# Altium PCB 400236.PcbDoc (part 4 of 7)
Units mm, origin at the board's own origin, x right, y up, seen from the top; angles counter-clockwise.
Board outline 136.53 x 63.5 mm, 4 copper layers (Top Layer, Mid-Layer 1, Mid-Layer 2, Bottom Layer), stack 1.49 mm thick; 344 components, 236 nets, 1364 pads, 1393 vias.
Unrouted connection lines stored in the file: 6.
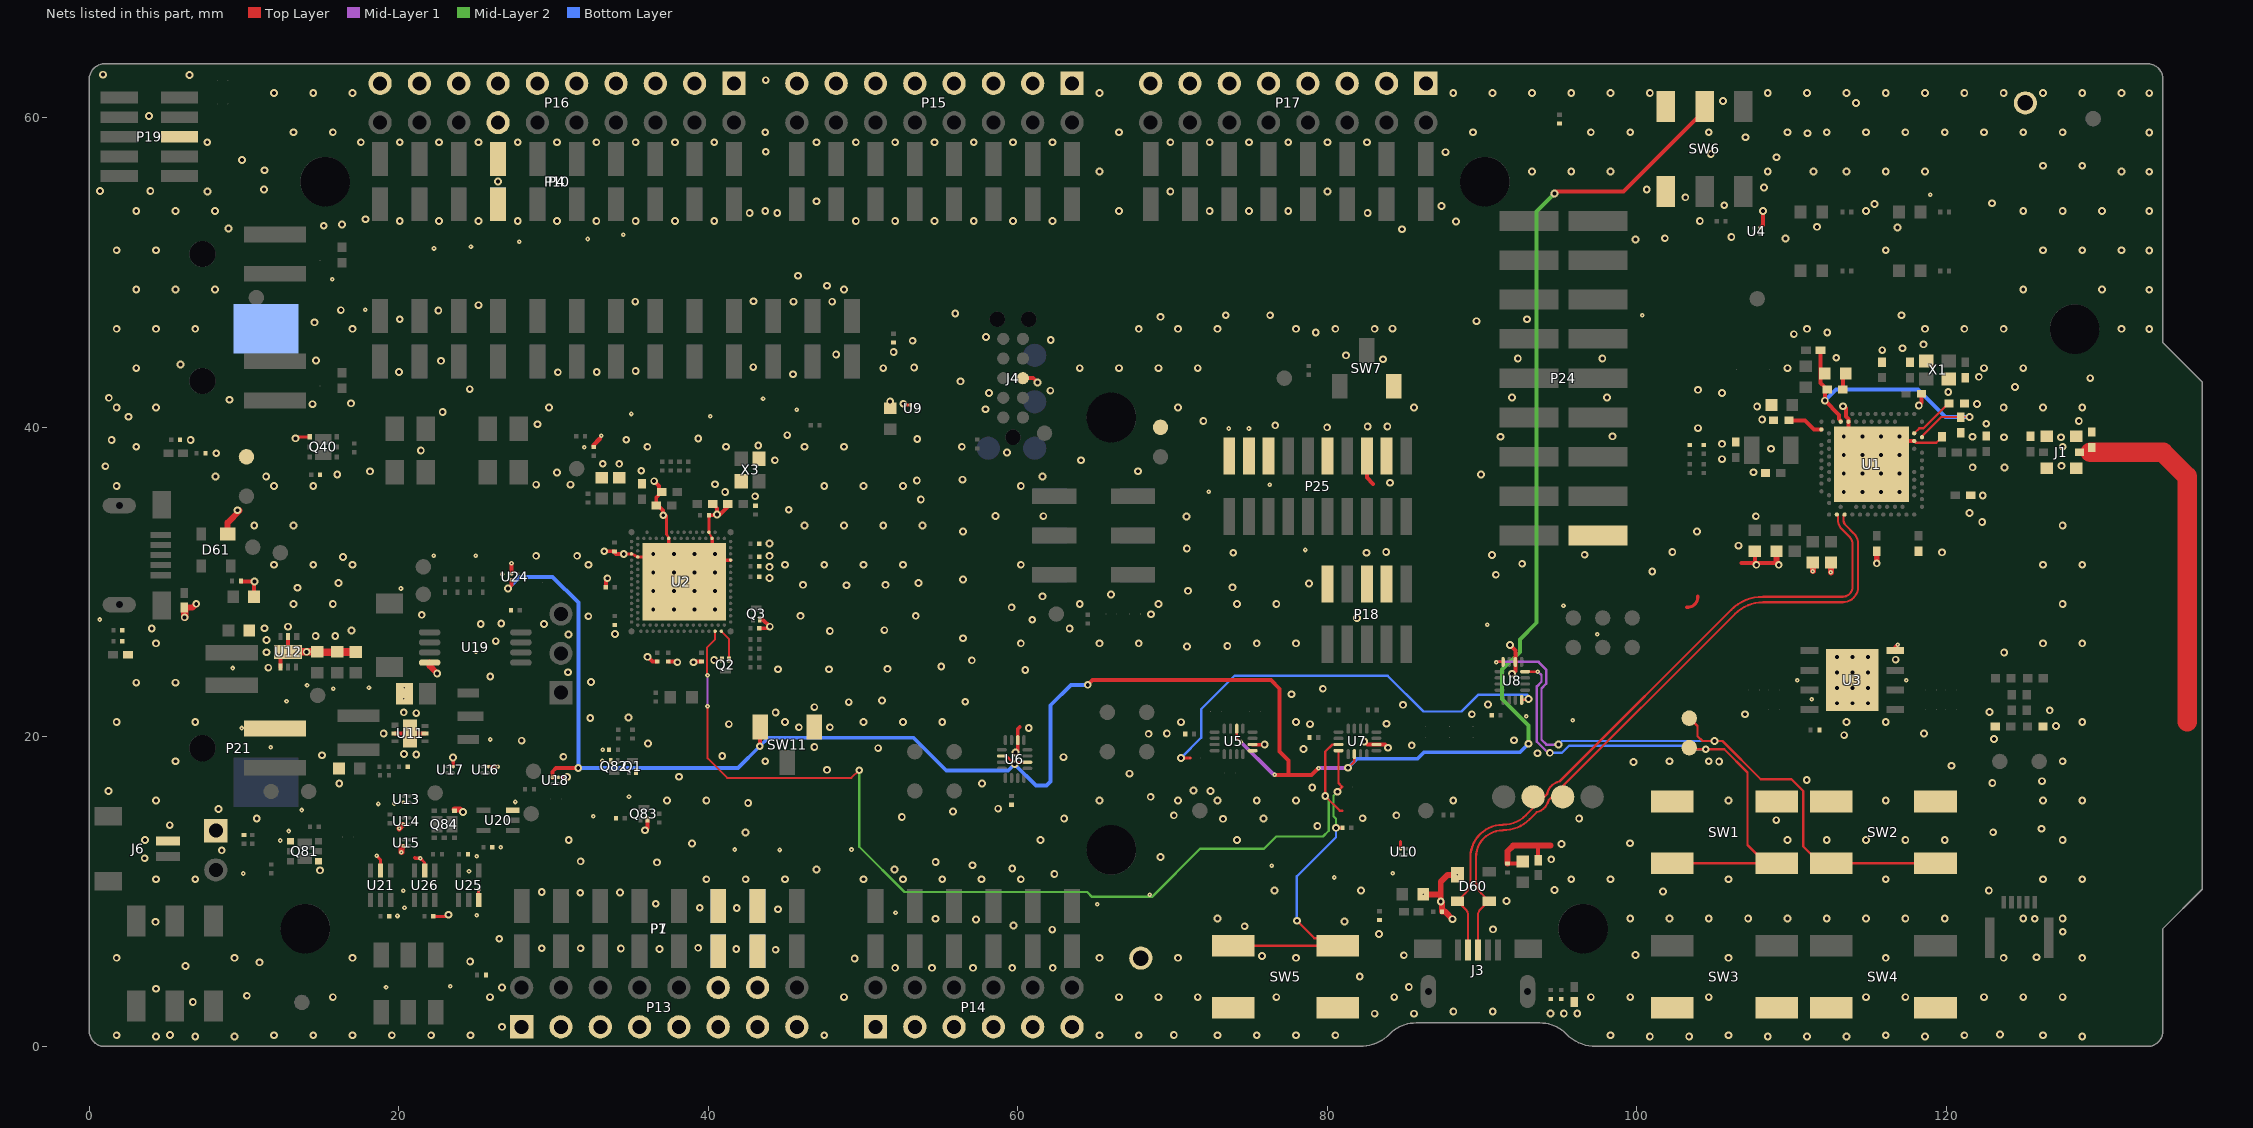
[diagram p4: the nets of this part, all layers, seen from the top]

## Via types
v1: diameter 0.5, hole 0.25, Top Layer to Bottom Layer, tented both sides, 1166 vias
v2: diameter 0.3, hole 0.1, Top Layer to Mid-Layer 1, tented top, 227 vias

## Nets (pads, with @x,y where several pads share a name; then routed paths per layer and width w, separated by ;. In a path a pad name is that pad's centre, name@x,y a point inside that pad or via, vN(x,y) a via of type N, cw(c..) or ccw(c..) an arc to the next point about the centre after c; other vN are vias at no path point) (continued)
GND: (continued)
  other v1: 4.312,0.647 6.852,0.647 9.392,0.647 100.832,0.647 103.372,0.647 108.452,0.647 110.992,0.647 113.532,0.647 118.612,0.647 128.772,0.647 1.772,0.723 11.932,0.723 14.472,0.723 17.012,0.723 19.552,0.723 22.092,0.723 24.632,0.723 47.492,0.723 65.272,0.723 67.812,0.723 72.892,0.723 75.432,0.723 77.972,0.723 80.512,0.723 98.292,0.723 105.912,0.723 116.072,0.723 121.152,0.723 126.232,0.723 5.223,0.737 70.079,0.737 123.463,0.774 26.67,1.27 83.052,2.12 85.592,2.12 94.412,2.134 95.275,2.134 96.139,2.134 88.138,2.261 90.678,2.261 6.696,2.87 15.742,3.187 25.902,3.187 48.762,3.187 66.542,3.187 69.082,3.187 71.622,3.187 76.702,3.187 84.322,3.187 97.022,3.187 99.562,3.187 104.642,3.187 114.802,3.187 117.342,3.187 122.422,3.187 124.962,3.187 127.502,3.187 10.185,3.277 4.309,3.734 26.67,3.81 85.261,3.847 82.093,4.521 52.07,5.08 54.458,5.08 57.099,5.08 59.639,5.08 62.255,5.08 6.214,5.207 10.998,5.436 24.613,5.486 49.454,5.69 1.772,5.727 9.392,5.727 17.012,5.727 65.272,5.727 70.352,5.727 77.972,5.727 105.912,5.727 116.072,5.727 123.692,5.727 128.772,5.727 125.806,5.766 75.768,5.842 84.938,5.893 99.898,5.918 44.348,6.248 36.85,6.3 41.808,6.299 34.35,6.325 29.235,6.35 31.75,6.35 39.345,6.375 26.492,6.96 83.337,7.264 127.508,7.417 62.225,7.55 90.703,7.569 74.651,7.772 59.725,7.825 4.283,8.052 81.102,8.077 57.3,8.2 54.675,8.25 72.892,8.267 99.562,8.267 102.102,8.267 104.642,8.267 107.182,8.267 109.722,8.267 112.262,8.267 114.802,8.267 117.342,8.267 119.882,8.267 124.962,8.267 125.705,8.255 127.502,8.267 44.501,8.865 41.834,8.941 39.446,8.966 36.6,9.225 91.567,9.398 31.725,9.931 34.3,9.95 29.235,9.982 101.676,10.008 76.581,10.084 82.169,10.084 122.733,10.084 94.666,10.109 4.312,10.807 6.852,10.807 39.872,10.807 42.412,10.807 44.952,10.807 50.032,10.807 52.572,10.807 55.112,10.807 57.652,10.807 60.192,10.807 95.752,10.807 98.292,10.807 105.912,10.807 116.072,10.807 126.232,10.807 128.772,10.807 62.357,11.151 14.91,11.379 46.99,11.43 52.032,11.43 59.639,11.506 57.074,11.709 36.678,11.897 54.686,11.913 31.75,11.963 94.463,12.09 3.581,12.167 69.215,12.243 8.56,12.675 95.123,13.081 38.938,13.117 99.543,13.132 3.607,13.335 30.982,13.347 61.462,13.347 74.162,13.347 109.722,13.347 112.262,13.347 114.802,13.347 117.342,13.347 119.882,13.347 127.502,13.347 42.4,13.825 123.012,13.843 126.136,14.072 79.35,14.249 5.207,14.3 109,14.625 73.254,14.707 10.82,14.732 62.992,14.732 75.87,14.732 82.275,14.75 96.266,14.732 52.502,14.834 70.079,14.935 84.455,14.935 24.145,15.149 55.804,15.189 8.357,15.342 58.725,15.367 42.575,15.725 4.312,15.887 37.332,15.887 39.872,15.887 65.272,15.887 70.352,15.887 72.892,15.887 75.432,15.887 77.972,15.887 88.132,15.887 105.912,15.887 116.072,15.887 126.232,15.887 128.772,15.887 68.58,16.129 1.245,16.51 72.441,16.51 71.349,16.535 79.019,16.739 16.154,16.993 57.683,16.993 122.961,17.018 126.162,17.145 110.973,17.221 38.1,17.425 67.208,17.628 47.675,17.875 120.32,18.136 99.775,18.375 5.582,18.427 43.682,18.427 102.102,18.427 104.642,18.427 105.308,18.415 127.502,18.427 23.499,18.673 62.941,18.694 30.632,18.72 40.9,18.775 15.037,18.821 21.133,18.872 20.345,18.898 93.575,18.95 78.461,19.228 50.975,19.275 46.85,19.35 85.446,19.456 36.1,19.575 27.94,19.761 92.05,19.787 123.063,19.863 113.386,20.117 68.45,20.2 19.025,20.218 69.625,20.225 118.542,20.218 60.706,20.574 45.85,20.625 47.85,20.625 127.076,20.701 41.325,20.825 78.867,20.828 83.82,20.853 1.772,20.967 6.852,20.967 44.952,20.967 50.032,20.967 52.572,20.967 55.112,20.967 70.536,20.955 77.972,20.967 113.532,20.967 116.072,20.967 128.772,20.967 32.375,21.225 34.85,21.25 89.332,21.463 106.985,21.463 21.133,21.539 44.35,21.575 20.32,21.59 122.784,21.615 126.67,21.717 46.85,21.925 84.887,22.073 90.373,22.098 112.919,22.173 113.919,22.173 114.919,22.173 49.075,22.25 56.6,22.275 51.225,22.35 77.673,22.758 79.705,23.114 112.919,23.173 113.919,23.173 114.919,23.173 3.042,23.507 5.582,23.507 32.425,23.55 25.908,23.901 91.923,24.079 112.919,24.173 113.919,24.173 114.919,24.173 30.937,24.181 60.475,24.325 44.5,24.375 47.8,24.375 51.575,24.4 11.575,24.475 55.05,24.55 57.025,24.95 40.375,24.975 116.713,24.994 112.919,25.173 113.919,25.173 114.919,25.173 11.45,25.475 123.723,25.451 70.925,25.85 73.533,25.883 4.312,26.047 60.192,26.047 65.272,26.047 67.812,26.047 75.432,26.047 77.972,26.047 126.232,26.047 128.772,26.047 26.264,26.187 11.453,26.262 56.45,26.375 14.628,26.516 15.898,26.516 30.963,26.619 33.975,26.65 47.85,26.85 16.95,26.875 51.375,26.9 4.039,27 11.326,27.024 63.348,27 12.85,27.125 25.298,27.305 29.388,27.305 26.619,27.331 60.925,27.575 81.915,27.686 32.25,27.8 45.95,27.825 53.4,27.825 21.488,27.889 68.6,27.925 36.439,28.227 37.772,28.227 39.105,28.227 40.439,28.227 59.6,28.375 13.202,28.587 15.742,28.587 64.002,28.587 69.082,28.587 74.162,28.587 76.702,28.587 127.502,28.587 61.595,29.083 66.015,29.21 36.439,29.427 37.772,29.427 39.105,29.427 40.439,29.427 70.993,29.439 13.452,29.642 73.863,29.667 48.925,29.8 46.125,29.825 51.45,29.825 78.816,29.921 16.104,29.947 53.575,29.95 56.45,30.175 43.95,30.275 90.881,30.48 36.439,30.627 37.772,30.627 39.105,30.627 40.439,30.627 100.99,30.683 43.955,30.992 11.932,31.127 14.472,31.127 17.012,31.127 32.252,31.127 44.952,31.127 47.492,31.127 50.032,31.127 52.572,31.127 60.192,31.127 107.714,31.117 126.232,31.127 128.772,31.127 92.583,31.191 16.4,31.625 28.875,31.7 31.525,31.7 43.95,31.7 90.627,31.75 96.622,31.775 36.439,31.827 37.772,31.827 39.105,31.827 40.439,31.827 73.914,31.902 82.525,31.902 119.71,31.928 83.795,31.953 102.286,31.953 70.917,32.182 106.553,32.36 43.95,32.5 56.45,33.275 103.886,33.274 10.662,33.667 13.202,33.667 46.222,33.667 48.762,33.667 51.302,33.667 53.842,33.667 127.502,33.667 122.301,33.884 70.891,34.239 107.68,34.258 58.55,34.275 61.646,34.265 37.089,34.327 121.488,34.468 9.575,34.65 45.2,34.675 53.731,35.335 43.025,35.55 122.339,35.592 41.089,35.827 113.364,35.817 114.564,35.817 115.764,35.817 116.964,35.817 1.772,36.207 11.932,36.207 14.472,36.207 47.492,36.207 50.032,36.207 52.572,36.207 60.192,36.207 28.875,36.3 31.1,36.3 40.425,36.325 84.049,36.424 53.475,36.575 56.425,36.625 8.153,36.83 11.43,36.83 61.595,36.83 89.925,36.95 16.027,36.957 113.364,37.017 114.564,37.017 115.764,37.017 116.964,37.017 30.226,37.084 107.528,37.103 18.136,37.16 67.759,37.17 35.664,37.202 121.689,37.417 123.739,37.416 1.041,37.49 127.422,37.517 33.175,37.65 34.247,37.647 44.3,37.875 64.075,37.875 105.486,37.948 113.364,38.217 114.564,38.217 115.764,38.217 116.964,38.217 8.204,38.329 59.3,38.375 21.425,38.5 108.664,38.617 3.042,38.747 36.062,38.747 41.142,38.747 46.222,38.747 48.762,38.747 56.382,38.747 127.502,38.747 43.225,38.825 105.486,38.938 1.448,39.192 6.553,39.192 34.7,39.2 53.5,39.25 39.35,39.275 13.335,39.294 123.714,39.367 127.397,39.367 91.186,39.395 113.364,39.417 114.564,39.417 115.764,39.417 116.964,39.417 121.681,39.395 98.425,39.421 45.1,39.5 103.95,39.95 79.985,40.005 82.601,40.056 83.871,40.056 76.632,40.132 28.956,40.206 122.57,40.234 71.984,40.411 128.549,40.411 108.087,40.506 2.54,40.691 22.835,40.996 57.912,41.173 1.772,41.287 4.312,41.287 29.712,41.287 70.352,41.287 85.592,41.287 123.692,41.287 126.232,41.287 128.772,41.287 107.764,41.342 113.313,41.368 14.427,41.504 52.6,41.525 121.964,41.517 16.916,41.554 9.068,41.783 1.27,41.91 91.923,41.935 98.069,41.935 58.141,42.215 105.486,42.215 120.114,42.292 62.1,42.375 103.95,42.425 24.587,42.469 124.426,42.617 56.3,42.975 129.286,43.18 122.089,43.267 45.466,43.434 30.277,43.561 20.015,43.586 32.791,43.586 35.306,43.637 3.042,43.827 51.302,43.827 64.002,43.827 66.542,43.827 69.082,43.827 71.622,43.827 109.722,43.827 122.422,43.827 124.962,43.827 53.3,43.875 42.901,43.891 5.893,44.069 22.733,44.298 14.65,44.325 83.591,44.399 92.304,44.45 97.765,44.45 112.878,44.501 81.204,44.653 48.26,44.704 51.975,44.875 115.845,44.992 117.164,45.117 118.516,45.364 53.2,45.6 62.125,45.65 57.937,45.847 110.134,46.025 79.248,46.126 112.293,46.126 1.772,46.367 4.312,46.367 6.852,46.367 17.012,46.367 67.812,46.367 70.352,46.367 72.892,46.367 77.972,46.367 80.512,46.367 83.052,46.367 110.992,46.367 118.612,46.367 121.152,46.367 123.692,46.367 131.312,46.367 133.096,46.355 84.201,46.38 14.554,46.787 89.637,46.863 20.066,46.99 92.888,46.99 69.215,47.142 73.431,47.244 76.302,47.244 117.094,47.244 55.956,47.356 22.555,47.549 16.256,47.574 25.15,47.9 35.275,48.125 45.5,48.125 48,48.125 42.925,48.15 3.042,48.907 5.582,48.907 8.122,48.907 48.762,48.907 124.962,48.907 130.042,48.907 133.096,48.895 47.675,49.15 45.8,49.8 1.772,51.447 4.312,51.447 116.072,51.447 126.232,51.447 128.772,51.447 131.312,51.447 133.096,51.435 99.898,52.146 109.601,52.197 101.803,52.222 106.096,52.299 84.825,52.8 9,52.85 116.84,52.908 111.633,52.959 15.15,53.025 16.332,53.111 88.3,53.3 20.066,53.34 22.606,53.34 25.146,53.34 27.686,53.34 30.226,53.34 32.766,53.34 35.306,53.34 37.846,53.34 40.386,53.34 49.53,53.34 52.07,53.34 54.61,53.34 57.15,53.34 59.69,53.34 62.23,53.34 104.064,53.34 17.85,53.45 42.672,53.848 44.45,53.848 82.601,53.858 3.042,53.987 5.582,53.987 8.122,53.987 43.682,53.987 66.542,53.987 72.39,53.975 74.93,53.975 77.47,53.975 114.802,53.987 124.962,53.987 127.502,53.987 130.042,53.987 133.096,53.975 87.376,54.305 105.639,54.356 115.341,54.432 122.936,54.483 46.99,54.61 103.124,54.864 7.645,55.245 69.85,55.245 80.01,55.245 0.7,55.275 3.95,55.275 11.3,55.375 100.635,55.372 108.204,55.499 26.416,55.89 65.272,56.527 93.212,56.527 95.752,56.527 98.292,56.527 108.452,56.527 113.532,56.527 116.072,56.527 118.612,56.527 131.312,56.527 133.096,56.515 111.404,56.54 11.328,56.617 126.232,56.908 128.772,56.908 9.875,57.275 109.017,57.455 104.775,57.658 87.63,57.785 43.713,57.81 7.625,58.425 17.551,58.42 20.066,58.42 22.606,58.42 25.146,58.42 27.686,58.42 30.226,58.42 32.766,58.42 35.306,58.42 37.846,58.42 40.386,58.42 46.99,58.42 49.53,58.42 52.07,58.42 54.61,58.42 57.15,58.42 59.69,58.42 62.23,58.42 69.85,58.42 72.39,58.42 74.93,58.42 77.47,58.42 80.01,58.42 82.55,58.42 107.01,58.75 111.023,59.004 13.202,59.067 15.742,59.067 43.682,59.067 66.542,59.067 89.402,59.067 97.022,59.067 99.562,59.067 104.642,59.067 109.722,59.067 112.262,59.067 114.802,59.067 117.342,59.067 119.882,59.067 122.422,59.067 124.962,59.067 127.502,59.067 133.096,59.055 3.861,60.122 114.144,60.957 105.562,61.087 11.932,61.607 14.472,61.607 17.012,61.607 65.272,61.607 88.132,61.607 90.672,61.607 93.212,61.607 95.752,61.607 98.292,61.607 100.832,61.607 108.452,61.607 110.992,61.607 113.532,61.607 116.072,61.607 118.612,61.607 121.152,61.607 123.692,61.607 126.232,61.607 128.772,61.607 131.312,61.607 133.096,61.595 43.713,62.433 6.477,62.763 0.889,62.789
  other v2: 19.177,3.835 23.325,3.886 19.914,8.433 25.044,8.484 52.095,8.636 20.371,8.966 65.126,9.195 68.529,9.804 20.295,10.058 80.442,10.922 9.957,11.176 84.226,11.201 24.536,11.328 76.403,11.684 25.044,12.294 44.625,12.7 41.7,12.725 49.25,12.725 26.594,12.878 12.344,13.31 12.903,13.919 32.563,14.884 13.741,15.277 18.669,15.672 19.71,15.697 27.534,15.799 34.874,16.129 33.15,18.45 33.175,19.175 11.735,19.329 25.908,19.837 9.855,20.574 95.86,21.082 92.837,21.336 12.75,22.3 111.303,22.428 20.32,22.454 15.775,23.125 18.075,23.175 20.345,23.165 14.075,23.35 110.363,23.673 117.399,23.673 9.275,24.45 24.994,25.502 97.434,26.634 90.322,27.254 0.686,27.584 95.25,28.473 20.142,29.591 26.68,30.505 112.522,30.632 111.354,30.709 22.25,31.699 24.975,31.7 78.562,32.08 72.339,35.839 76.276,36.297 31.979,38.71 33.071,39.472 73.635,39.929 74.93,39.929 40.132,40.716 35.027,40.869 45.72,41.148 43.536,41.859 100.33,47.244 17.831,47.6 15.697,49.581 22.276,51.562 24.663,51.664 27.788,51.994 32.207,52.172 34.493,52.451 118.948,55.042
I\F\_\O\F\F\: SW6.2 SW11.1 U5.10 U6.2 U6.10 U7.2 U18.B2 U24.B2 | length 153.4
  Top Layer w0.152: U6.10@58.967,18.767 59.26,18.767 v1@59.66,18.367 ; v1@59.792,18.367 U6.2@60.617,18.367 ; U5.10@74.132,20.532 74.147,20.518 74.147,19.928 v2(74.4,19.675) ; v1(81.331,18.009) 81.74,18.418 U7.2@81.74,18.885
  Top Layer w0.25: v1(27.051,29.591) 27.283,29.823 U24.B2@27.283,30.153
  Top Layer w0.254: U18.B2@29.919,17.386 29.919,17.752 30.166,17.999 v1(31.6,18) v1(31.6,18) ; v1(43.325,19.4) 43.35,19.425 SW11.1@43.35,20.65 ; v1(64.516,23.368) 64.823,23.675 76.35,23.675 76.913,23.112 76.913,19.048 77.495,18.466 77.495,17.533 ; v2(76.6,17.55) 76.617,17.533 77.495,17.533 ; v2(79.426,17.983) 78.976,17.533 77.495,17.533 ; v1(94.666,55.118) 94.793,55.245 99.129,55.245 SW6.2@104.369,60.484
  Mid-Layer 1 w0.254: v2(74.4,19.675) 76.507,17.568 76.582,17.568 v2(76.6,17.55) ; v2(79.426,17.983) 81.305,17.983 v1(81.331,18.009)
  Mid-Layer 2 w0.254: v1(92.989,19.558) 92.989,20.752 91.288,22.454 91.288,24.359 92.431,25.502 92.431,26.309 93.497,27.376 93.497,53.95 v1(94.666,55.118)
  Bottom Layer w0.254: v1(27.051,29.591) 27.805,30.345 29.929,30.345 31.6,28.674 v1(31.6,18) 41.925,18 v1(43.325,19.4) 43.875,19.95 53.25,19.95 55.375,17.825 59.379,17.825 v1(59.792,18.237) 61.163,16.866 61.849,16.866 62.103,17.12 62.103,22.046 63.425,23.368 v1(64.516,23.368) ; v1(81.331,18.009) 81.915,18.593 85.827,18.593 86.245,19.011 92.443,19.011 v1(92.989,19.558)
IMCU_BOOT: SB46.2 U2.AL27 U7.15 | length 65.3
  Top Layer w0.125: v2(39.95,21.975) 39.95,18.614 41.214,17.35 49.25,17.35 v1(49.75,17.85) ; v2(39.95,23.975) 39.901,24.024 39.901,25.776 40.439,26.314 U2.AL27@40.439,26.827
  Top Layer w0.152: v1(79.858,16.18) v1@79.865,16.172 ; v1@79.916,16.172 v1@80.035,16.172 ; U7.15@80.715,19.51 80.326,19.51 79.865,19.05 v1@79.865,16.172 ; 80.968,15.24 80.797,15.24 80.793,15.244 v1@79.865,16.172
  Mid-Layer 1 w0.125: v2(39.95,21.975) v2(39.95,23.975)
  Mid-Layer 2 w0.152: v1(49.75,17.85) 49.75,12.9 52.668,9.982 64.478,9.982 64.794,9.667 68.659,9.667 71.768,12.776 75.903,12.776 76.69,13.564 79.706,13.564 80.086,13.944 80.086,15.951 v1(79.858,16.18)
IMCU_LED: Q2.1 U2.AL29 | length 2
  Top Layer w0.125: U2.AL29@40.839,26.827 41.325,26.341 Q2.1@41.325,25